# EAGLE board Temperatura y humedadALIM (EAGLE 7.5.0)
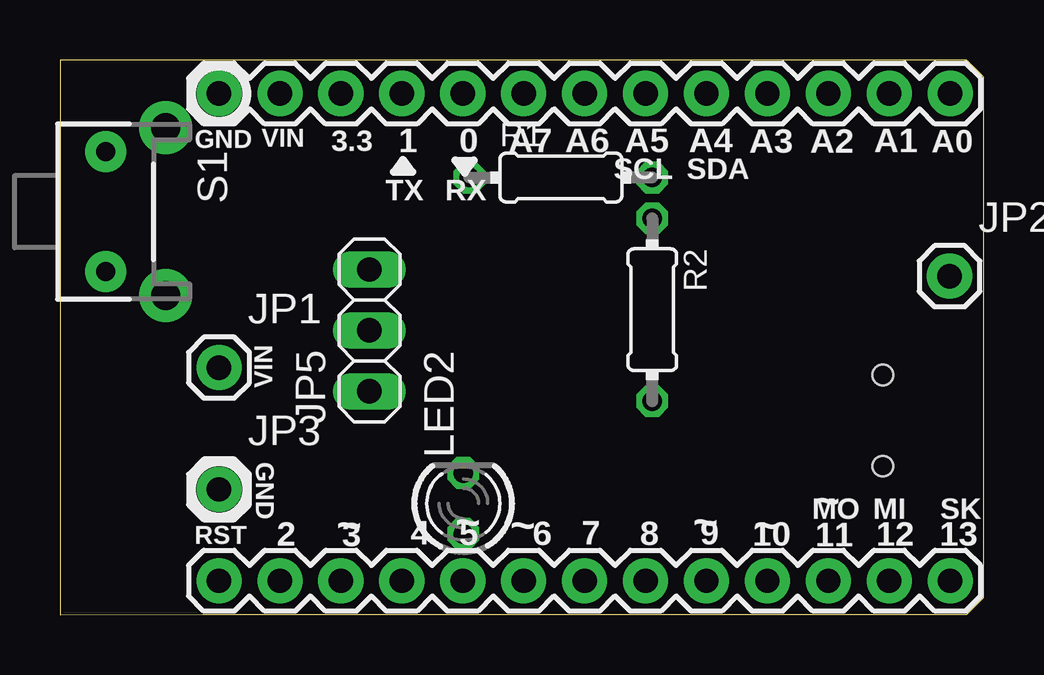
[diagram p0: board, top side]
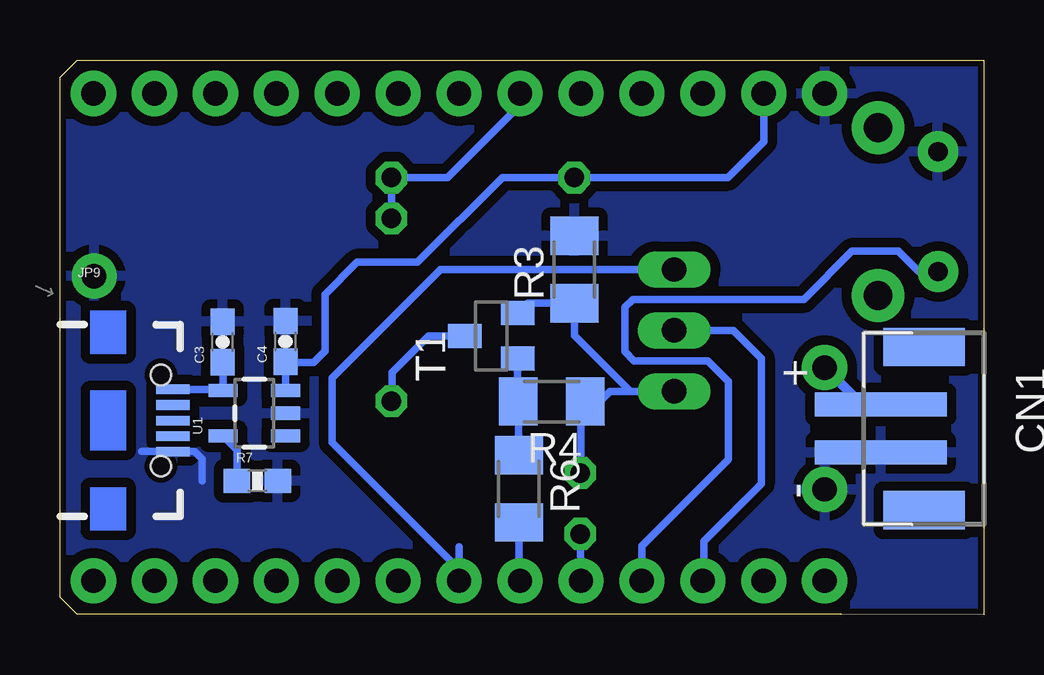
[diagram p1: board, bottom side, seen from below]

Size 38.51 x 23.14 mm. Coordinates in mm from the lower left corner, seen from the top.
Outline: 5.94,0.02 37.79,0.02 38.51,0.74 38.51,22.43 37.79,23.14 0,23.14 0,0 5.94,0.02
Copper layers (1*16): Top 0.035mm / dielectric 1.5mm / Bottom 0.035mm
Design rules "ITEADstudio_DRC *": minimum track width 6mil, minimum drill 12mil, track to track 16mil, track to pad 16mil, pad to pad 6mil, via to via 6mil, smd to smd 6mil, copper to edge 10mil, drill to drill 10mil, minimum pad ring 10mil, minimum via ring 6mil, stop-mask expansion 2mil, vias tented up to drill 100mil, thermal gap 15mil
Net classes: 1 power: width 0.381 mm, clearance 0.254 mm

## Footprints (pad centres in the part's own frame; a part is rotated, then mirrored left to right if it is on the bottom)
1X13 = drill 1.016 pad 1.88: 1 0,0; 2 2.54,0; 3 5.08,0; 4 7.62,0; 5 10.16,0; 6 12.7,0; 7 15.24,0; 8 17.78,0; 9 20.32,0; 10 22.86,0; 11 25.4,0; 12 27.94,0; 13 30.48,0
0603-CAP = smd 1.1 x 1: 1 -0.85,0; 2 0.85,0
JST-PH-2-SMT = smd 1 x 5.5: 1 -1,-1.8; 2 1,-1.8 | smd 1.6 x 3.4: NC1 -3.4,0; NC2 3.4,0
1X01 = drill 1.016 pad 1.88: 1 0,0
1X03 = drill 1.016 long: 1 -2.54,0; 2 0,0; 3 2.54,0
USB-AB-MICRO-SMD_V03 = smd 1.4 x 0.4: D+1 2.7,0; D-1 2.7,0.65; GND1 2.7,-1.3; ID1 2.7,-0.65; VBUS1 2.7,1.3 | hole 0.85: 2.2,1.9; 2.2,-1.9
LED3MM = drill 0.813 octagon: A -1.27,0; K 1.27,0
0204/7 = drill 0.813 octagon: 1 -3.81,0; 2 3.81,0
M1206 = smd 1.6 x 2: 1 -1.4,0; 2 1.4,0
0603-RES = smd 1.1 x 1: 1 -0.85,0; 2 0.85,0
TACTILE-PTH-SIDEEZ = drill 0.8 pad 1.7: 1 -2.5,0; 2 2.5,0 | drill 1.2 pad 2.2: ANCHOR1 -3.5,2.5; ANCHOR2 3.5,2.5
SOT23 = smd 1 x 1.4: 1 -0.95,-1.1; 2 0.95,-1.1; 3 0,1.1
SOT23-5 = smd 0.55 x 1.2: 1 -0.95,-1.3; 2 0,-1.3; 3 0.95,-1.3; 4 0.95,1.3; 5 -0.95,1.3

## Placement (x,y rotation side)
ANALOGSIDE  M13  [1X13]  37.11,21.74 180 top
C3  4.7uF  [0603-CAP]  31.72,11.38 90 bottom
C4  4.7uF  [0603-CAP]  29.11,11.4 90 bottom
CN1  [JST-PH-2-SMT]  2.49,7.77 270 bottom
DIGITALSIDE  M13  [1X13]  37.11,1.42 180 top
JP1  M01PTH  [1X01]  6.63,10.31 0 top
JP2  M01PTH  [1X01]  37.08,14.12 0 top
JP3  M01PTH  [1X01]  6.63,5.23 0 top
JP5  [1X03]  12.9,11.86 90 top
JP9  Micro USB  [USB-AB-MICRO-SMD_V03]  36.5,8.1 0 bottom
LED2  [LED3MM]  16.81,4.65 90 top
R1  [0204/7]  20.88,18.24 0 top
R2  [0204/7]  24.69,12.73 270 top
R3  [M1206]  17.07,14.4 90 bottom
R4  [M1206]  18.01,8.89 180 bottom
R6  [M1206]  19.38,5.26 270 bottom
R7  2.0k  [0603-RES]  30.28,5.59 0 bottom
S1  SWITCH-MOMENTARY-2SIDE_EZ  [TACTILE-PTH-SIDEEZ]  1.91,16.81 270 top
T1  BC850  [SOT23]  20.52,11.63 90 bottom
U1  MCP73831  [SOT23-5]  30.4,8.41 90 bottom

## Library data of the parts
ANALOGSIDE DIGITALSIDE JP1-JP3 = SparkFun-Connectors
C3 C4 = SparkFun-Capacitors; PROD_ID: CAP-08280
CN1 = adafruit
JP5 = pinhead
JP9 = SparkFun-Connectors; PROD_ID: CONN-11794
LED2 = led
R1-R4 R6 = rcl
R7 = SparkFun-Resistors; PROD_ID: RES-08296
S1 = SparkFun-Electromechanical
T1 = transistor
U1 = SparkFun-PowerIC; PROD_ID: IC-09995

## Nets
AGND [power]: CN1.2 JP3.1
GND [power]: ANALOGSIDE.13 R3.2 S1.1
GND1 [power]: C3.2 C4.2 JP2.1 JP9.GND1 R7.2 U1.2
N$1: DIGITALSIDE.10 S1.2
N$2: DIGITALSIDE.11 JP5.2
N$3: DIGITALSIDE.7 JP5.3
N$4 [power]: JP5.1 LED2.K R3.1 R4.1 T1.2
N$5: C3.1 JP9.VBUS1 U1.4
N$6: ANALOGSIDE.8 R1.2 R2.1
N$7: R2.2 T1.3
N$8: R4.2 R6.1 T1.1
N$9: DIGITALSIDE.8 R6.2
N$10: DIGITALSIDE.9 LED2.A
PROG: R7.1 U1.5
VCC: CN1.1 JP1.1
VIN: ANALOGSIDE.12 C4.1 R1.1 U1.3

## Tracks (layer width: path | path; a pad name or v marks a point on that pad's centre or on a via)
AGND
  pour Bottom: 5,23.77 39.01,23.77 39.01,-0.43 -1.09,-0.51 -1.09,23.67
GND
  pour Bottom: -1.09,22.96 38.68,23.22 38.68,-0.15 -1.09,-0.41
GND1
  Bottom 0.305: JP9.GND1 | JP9.GND1 35.1,6.81 | JP9.GND1 32.89,6.81 32.59,6.5 32.59,5.59
  pour Bottom: -1.07,24.31 39.65,24.23 39.65,-1.57 -1.07,-1.5
N$1
  Bottom 0.305: S1.2 2.71,14.31 3.56,15.16 5.49,15.16 7.49,13.16 14.63,13.16 14.96,12.83 14.96,10.97 14.58,10.59 11.51,10.59 10.64,9.73 10.64,6.48 14.25,2.87 DIGITALSIDE.10
N$2
  Bottom 0.305: JP5.2 10.44,11.86 9.27,10.69 9.27,5.46 11.66,3.07 11.66,1.47 DIGITALSIDE.11
N$3
  Bottom 0.305: JP5.3 22.63,14.4 27.15,9.88 27.15,7.19 21.87,1.91 DIGITALSIDE.7 | 21.84,1.45 DIGITALSIDE.7 | 21.87,2.84 DIGITALSIDE.7
N$4
  Bottom 0.305: JP5.1 14.73,9.32 | 14.73,9.32 15.57,9.32 16.61,8.28 | LED2.K 16.79,5.94 16.79,8.1 16.61,8.28 | 14.73,9.32 17.07,11.66 R3.1 19,13 T1.2 | R4.1 16.61,8.28
N$5
  Bottom 0.305: C3.1 31.7,10.51 U1.4 31.75,9.4 JP9.VBUS1
N$6
  Bottom 0.305: ANALOGSIDE.8 19.33,21.26 22.35,18.24 R1.2 R2.1
N$7
  Bottom 0.305: T1.3 23.14,11.63 24.66,10.11 24.66,8.94 R2.2
N$8
  Bottom 0.305: T1.1 R4.2 R6.1
N$9
  Bottom 0.305: R6.2 19.38,1.47 DIGITALSIDE.8
N$10
  Bottom 0.305: LED2.A DIGITALSIDE.9
PROG
  Bottom 0.305: U1.5 31.13,6.88 R7.1
VCC
  Bottom 0.406: CN1.1 5.09,8.77 JP1.1
VIN
  Bottom 0.305: U1.3 C4.1 29.07,10.52 27.94,10.52 27.46,11 27.46,13.36 26.11,14.71 23.6,14.71 20.07,18.24 R1.1 10.67,18.24 9.17,19.74 ANALOGSIDE.12

## Text on the board
_tsilk: GND | VIN | 3.3 | 1 | 0 | A7 | A6 | A5 | A4 | A3 | A2 | A1 | A0 | TX | RX | SCL | SDA | VIN | GND | 2 | 3 | 4 | 5 | 6 | 7 | 8 | 9 | 10 | MO | ~ | 11 | MI | 12 | SK | 13 | RST | ~ | ~ | ~ | ~ | ~